# Altium PCB heatGun.PcbDoc
Units mm, origin at the board's own origin, x right, y up, seen from the top; angles counter-clockwise.
Board outline 152.4 x 101.6 mm, 2 copper layers (Top, Bottom); 58 components, 46 nets, 196 pads, 45 vias.
Unrouted connection lines stored in the file: 1.
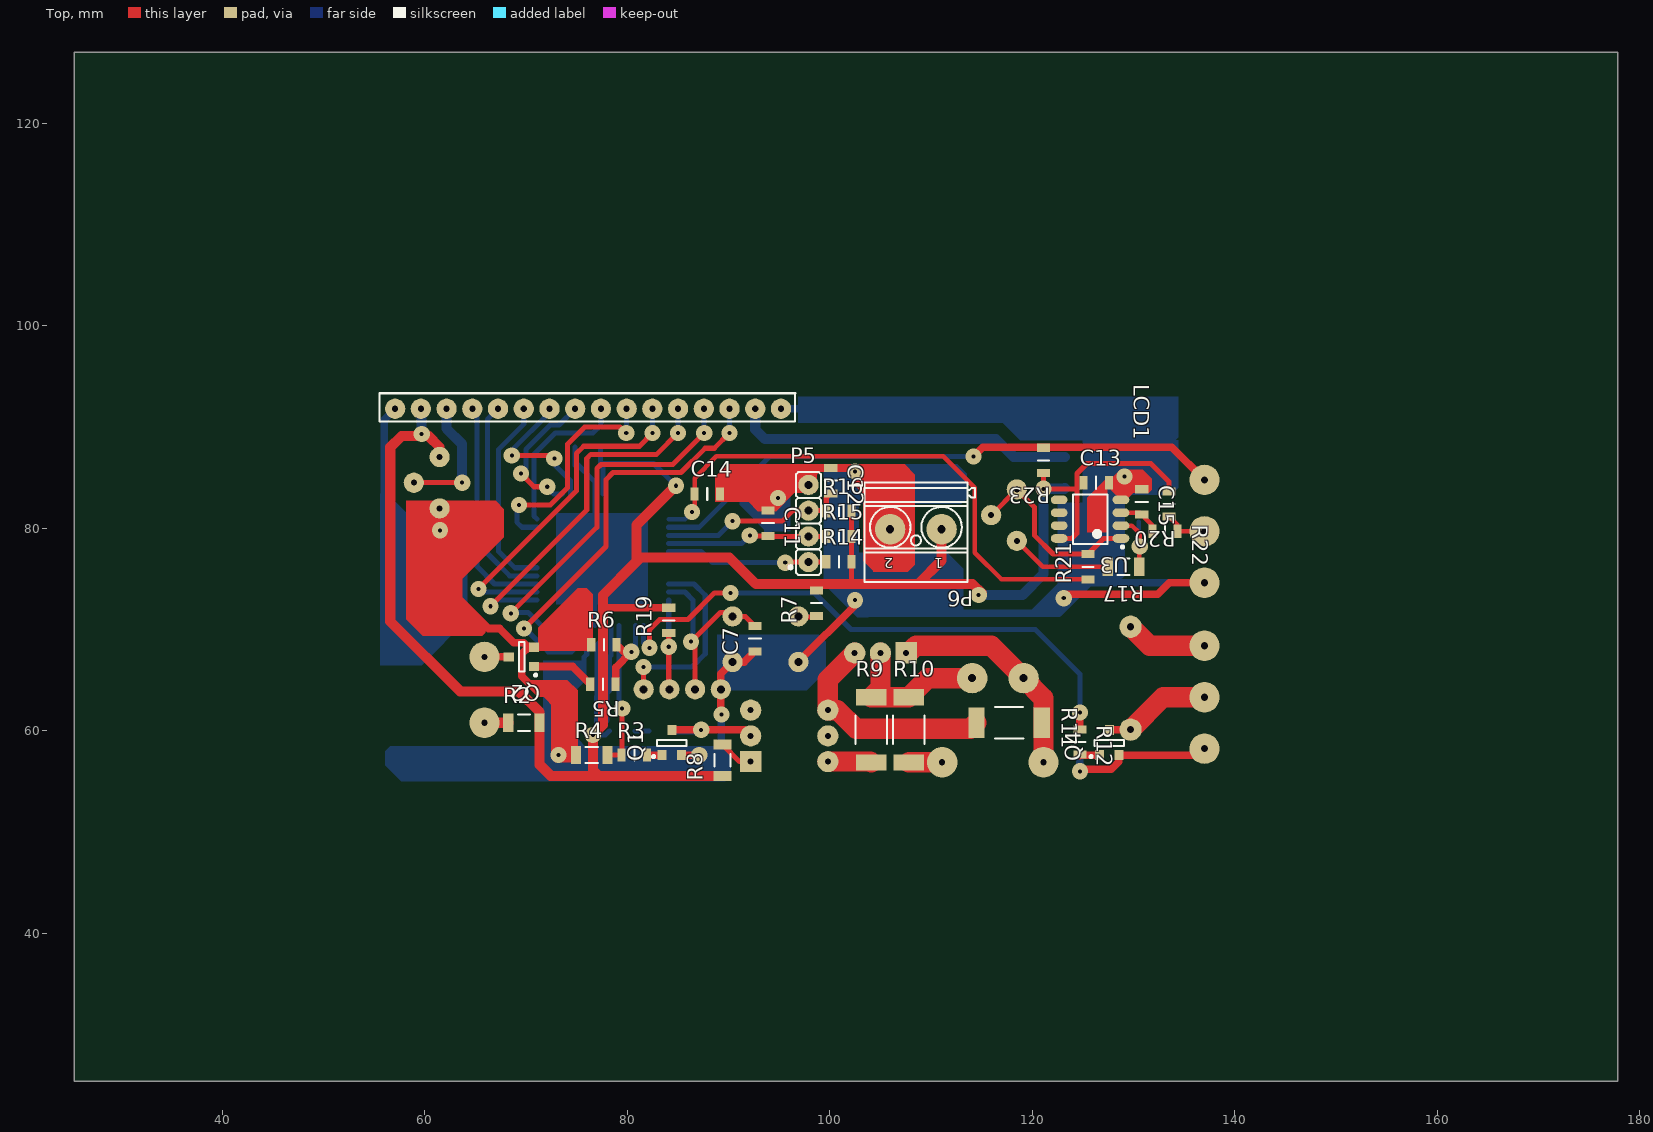
[diagram p0: Top view]
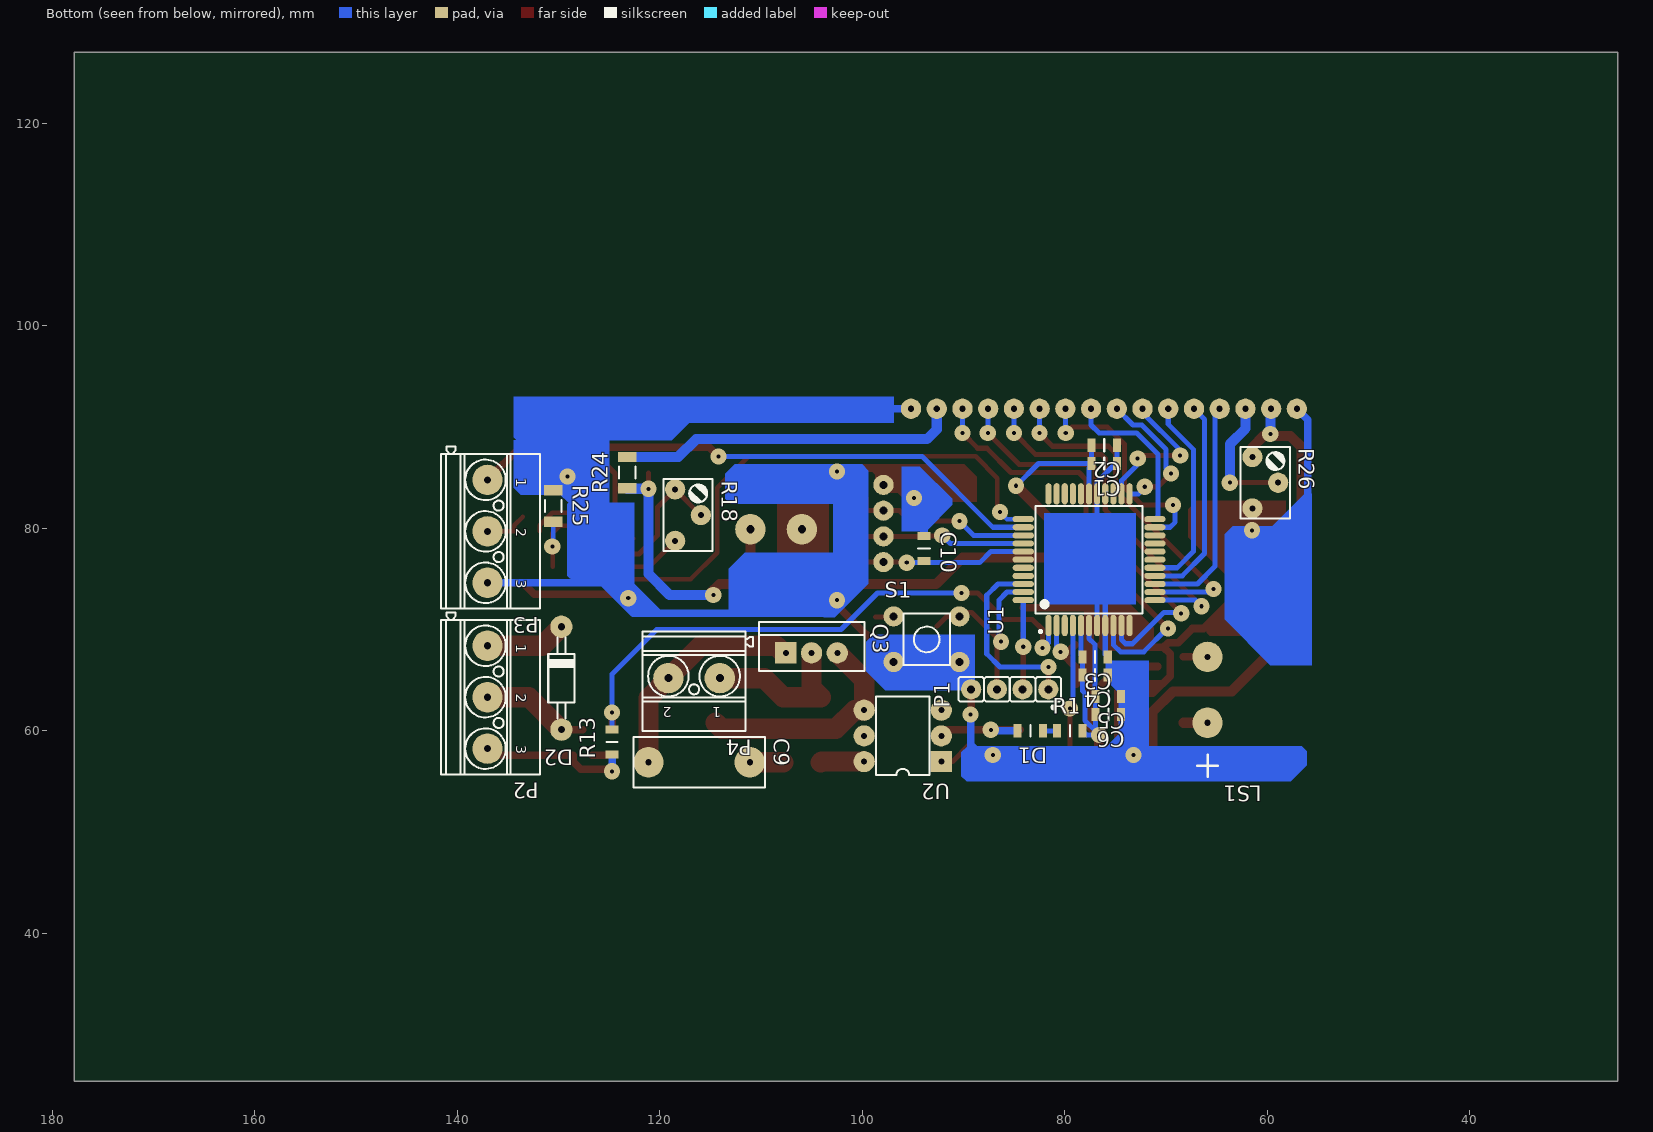
[diagram p1: Bottom view, seen from below]
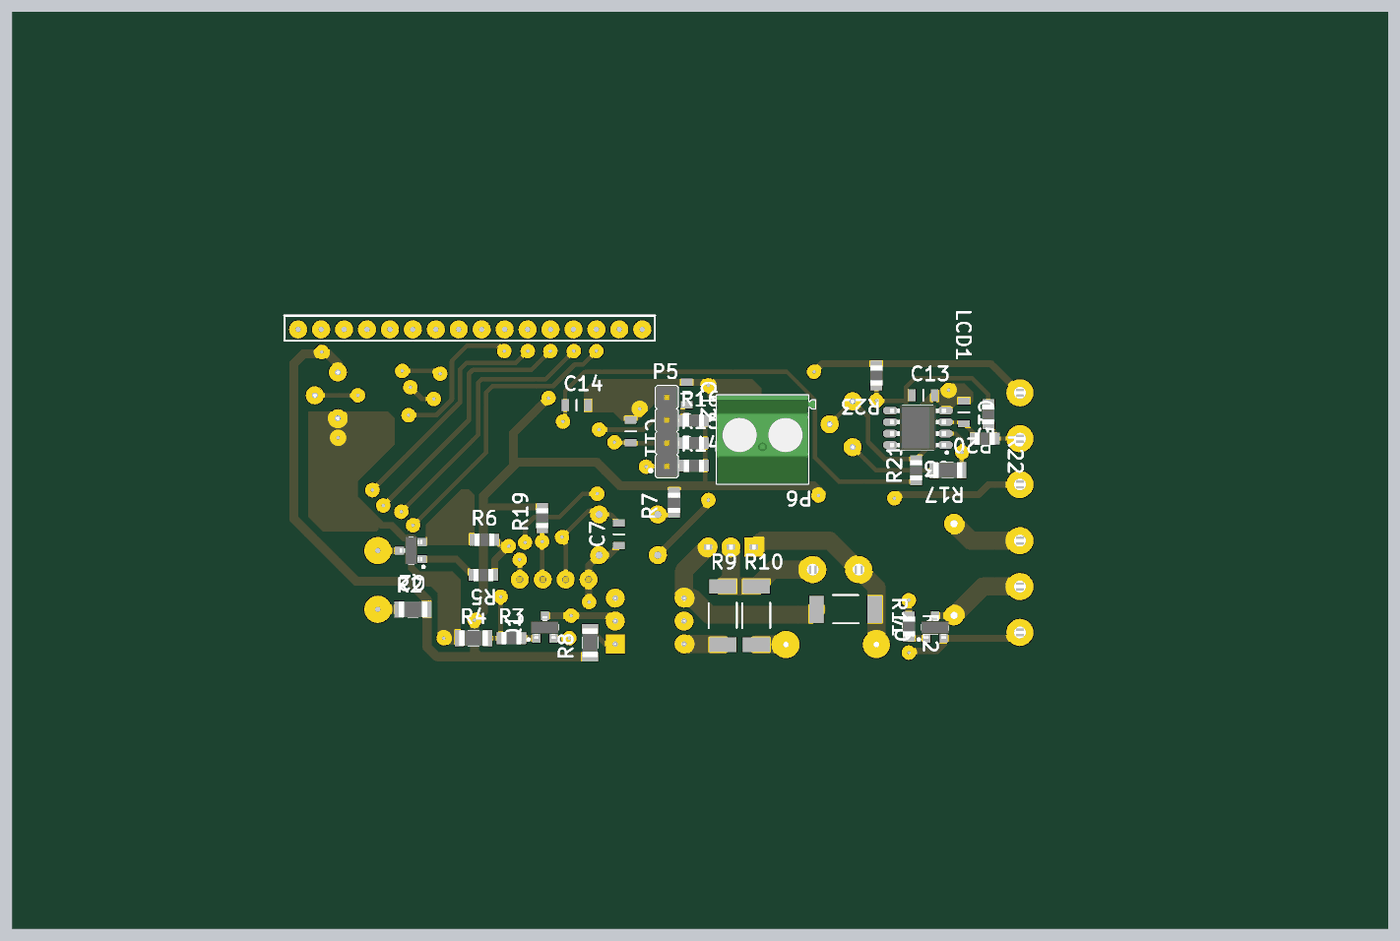
[diagram p2: 3D render of the assembled board from above, using the file's embedded part models]
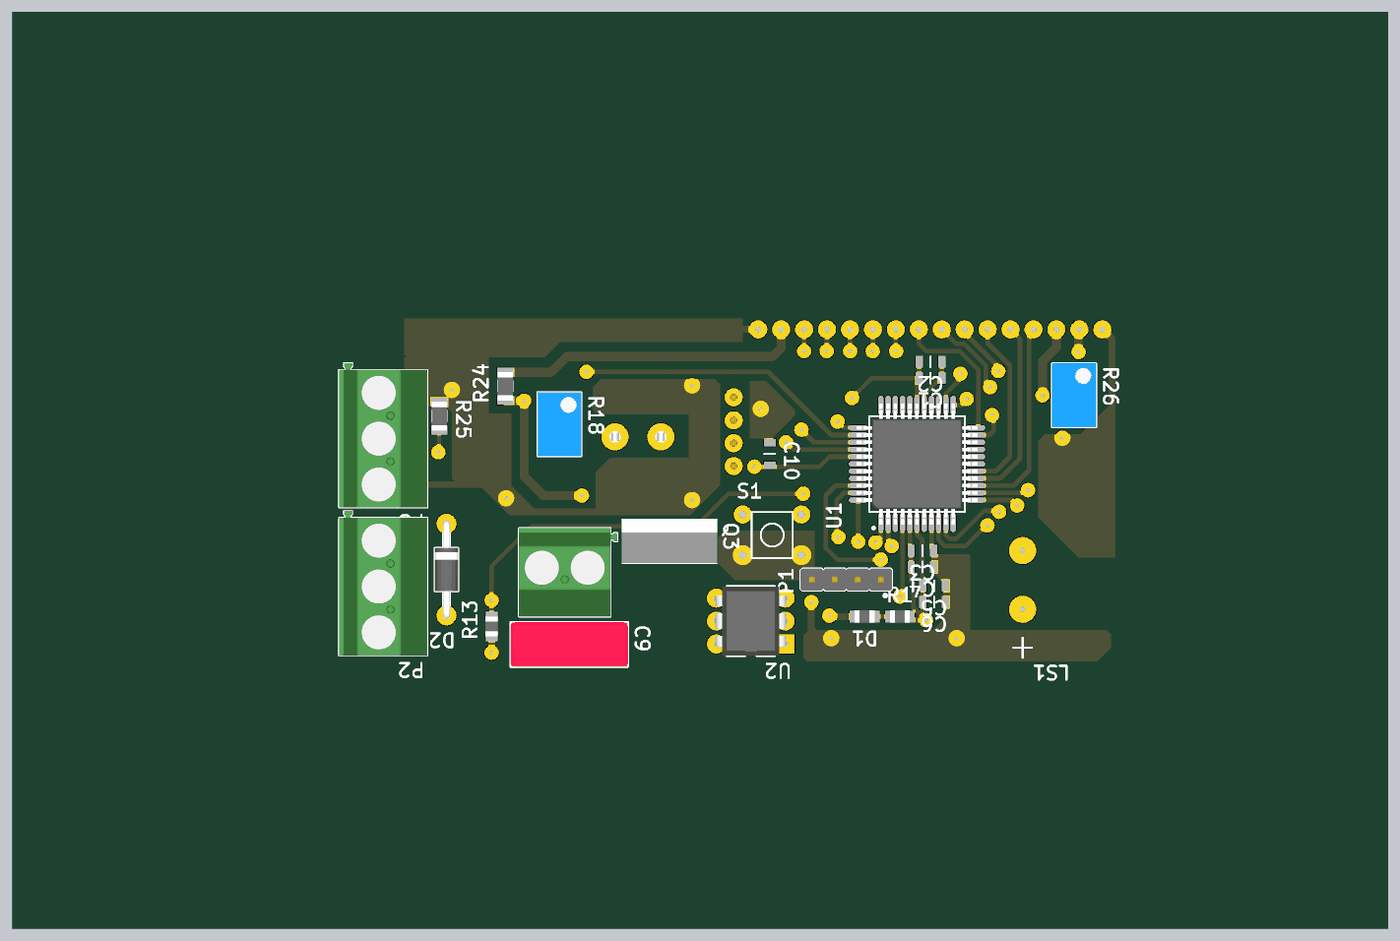
[diagram p3: 3D render of the assembled board from below, using the file's embedded part models]

## Layer stack, top to bottom
Top Solder: solder mask 0.0102, Solder Resist, Dk 3.5
Top: signal copper 0.0356
Dielectric 1: dielectric 0.32, FR-4, Dk 4.8
Bottom: signal copper 0.0356
Bottom Solder: solder mask 0.0102, Solder Resist, Dk 3.5

## Board outline
25.4,25.4 177.8,25.4 177.8,127 25.4,127

## Design rules (kind name [scope] priority, off if disabled: settings)
Clearance [All] p1: gap=0.1 except(0.2: Arc-Poly Track-Poly SMDPad-Poly THPad-Poly Via-Poly Fill-Poly Poly-Poly)
ComponentClearance ComponentClearance_1 [All] p1: gap=0.254 collisioncheckmode=3 verticalgap=0.254 showdistances=FALSE
ComponentClearance lcd [InComponent('LCD1')] p2: gap=0 collisioncheckmode=3 verticalgap=2540 showdistances=FALSE
PolygonConnect [All] p1: connectstyle=Relief reliefconductorwidth=0.4 reliefentries=4 polygonreliefangle="90 Angle" airgapwidth=0.3
RoutingVias [All] p1: holewidth=0.4 width=1.6 viastyle="Through Hole" minholewidth=0.4 minwidth=1.6 maxholewidth=0.4 maxwidth=1.6
SolderMaskExpansion [All] p1: expansion=0.102
Width [All] p1: maxlimit=10 minlimit=0.3 preferedwidth=0.5
29 further rules are at their usual default settings.

## Components (designator, comment, footprint, x,y, rotation, side; value= is the part's Value field where it differs from the comment)
C1 "Cap 0.1uf" 0805_C 76.1,86.4 r0 bottom
C2 "Cap 1uf" 0805_C 76.1,88.2 r0 bottom
C3 "Cap 0.1uf" 0805_C 77,67.3 r0 bottom
C4 "Cap 1uf" 0805_C 77,65.5 r0 bottom
C5 "Cap 0.1uf" 0805_C 75.7,63.4 r0 bottom
C6 "Cap 1uf" 0805_C 75.7,61.6 r0 bottom
C7 "Cap 0.1uf" 0805_C 92.6,69.1 r90 top
C9 "Cap 0.01uf 275VAC" CAPR1000-500X1300X1100 116.1,56.9 r180 bottom
C10 "Cap 0.01uf" 0805_C 93.9,78 r270 bottom
C11 "Cap 0.01uf" 0805_C 93.9,80.5 r270 top
C12 "Cap 0.1uf" 0805_C 100.1,84.7 r270 top
C13 "Cap 0.1uf" 0805_C 126.3,84.5 r0 top
C14 "Cap 0.1uf" 0805_C 87.9,83.4 r0 top
C15 "Cap 0.01uf" 0805_C 130.8,82.6 r270 top
D1 "LED1_smd" 0805_R 83.4,60 r0 bottom
D2 "fr107" DO-41 129.7,65.2 r270 bottom
LCD1 "LCD1602" "LCD1602 w/o body" 76.13,91.8 r0 top
LS1 "Beeper" Beeper 65.9,64.05 r270 bottom
P1 "Pin header 4" Pin_header_4P_2.54_M 81.62,64.1 r0 bottom
P2 "Pin header 3" PHOENIX_1715734 137,63.32 r270 bottom
P3 "Pin header 3" PHOENIX_1715734 137,79.7 r270 bottom
P4 "Pin header 2" PIN_HEADER_2_5.08 116.6,65.2 r0 bottom
P5 "Pin header 4" Pin_header_4P_2.54_M 97.9,76.66 r90 top
P6 "Pin header 2" PIN_HEADER_2_5.08 108.5,79.9 r180 top
Q1 "S9013" SOT23 84.4,58.8 r90 top
Q2 "S9013" SOT23 69.6,67.3 r180 top
Q3 "Triac" TO-220-v 105,67.7 r180 bottom
Q4 "BC817" SOT23 127.6,58.8 r90 top
R1 "Res 390" 0805_R 79.5,60 r180 bottom
R2 "Res 100" 1206_R 69.8,60.8 r0 top
R3 "Res 1K5" 0805_R 80.7,57.6 r0 top
R4 "Res 10K" 1206_R 76.5,57.6 r0 top
R5 "Res 1K5" 0805_R 77.6,64.6 r180 top
R6 "Res 10K" 0805_R 77.7,68.5 r0 top
R7 "Res 10K" 0805_R 98.7,72.6 r90 top
R8 "Res 39" 1206_R 89.4,57.1 r90 top
R9 "Res 360" 2512_S 104.1,60.1 r90 top
R10 "Res 39" 2512_S 107.8,60.1 r90 top
R11 "Res 330" 2512_S 117.7,60.8 r0 top
R12 "Res 1K5" 0805_R 124.7,58.9 r270 top
R13 "Res 10K" 0805_R 124.7,58.9 r90 bottom
R14 "Res 4K7" 0805_R 100.9,76.7 r0 top
R15 "Res 4K7" 0805_R 100.9,79.2 r0 top
R16 "Res 10K" 0805_R 100.9,81.7 r0 top
R17 "Res 56K" 1206_R 129,76.2 r180 top
R18 "RPot_100k" TRIM_BOURNS_3266W 117.2,81.3 r270 bottom
R19 "Res 10K" 0805_R 84.1,70.9 r90 top
R20 "Res 10K" 0805_R 133.5,82.4 r270 top
R21 "Res 10K" 0805_R 125.5,76.2 r90 top
R22 "Res 10K" 0805_R 133.1,79.7 r0 top
R23 "Res 10K" 0805_R 121.1,86.7 r270 top
R24 "Res 100" 1206_R 123.2,85.5 r90 bottom
R25 "Res 1K" 1206_R 130.5,82.2 r270 bottom
R26 "RPot_10k" TRIM_BOURNS_3266W 60.2,84.5 r270 bottom
S1 "SW_TAKT" TAKT-KEY 96.9,66.8 r180 bottom
U1 "MKE04Z128VLD4" QFP80P1390X1390X245-44N 77.6,76.9 r90 bottom
U2 "MOC3041" DIP6-300 96,59.5 r0 bottom
U3 "LM358ADR" SOIC127_8 125.7,80.9 r180 top

## Footprints (in the part's own frame and the unit in brackets; to place one, negate y for a bottom-side part, rotate by r counter-clockwise, add the part's x,y. Pads: shape width x height; smd on the part's side, far side on the other; paste and mask are expansions set on the pad)
0805_C [mm] "Chip Resistor, Body 2.0x1.2mm, IPC Medium Density"
  rect 0.8x1.3 smd: 1(-1.25,0) 2(1.25,0)
  silkscreen extent 0,-0.6 0,0.6, body extent -1.07,-0.7 1.07,0.7, height 0.7
0805_R [mm] "Chip Resistor, EIA 0805, Metric 2012, Body 2.0x1.25mm, IPC Medium Density"
  rect 0.8x1.3 smd: 1(-1.25,0) 2(1.25,0)
  silkscreen extent 0,-0.55 0,0.55, body extent -1.1,-0.67 1.1,0.68, height 0.5
1206_R [mm] "Chip Resistor, EIA 1206, Metric 3016, Body 3.05x1.55mm, IPC Medium Density"
  rect 1x1.8 smd: 1(-1.55,0) 2(1.55,0)
  silkscreen extent -0.6,-0.8 0.6,0.8, body extent -1.6,-0.85 1.6,0.85, height 0.65
2512_S [mm] "SMD"
  rect 1.6x3 smd: 1(-3.225,0) 2(3.225,0)
  silkscreen extent -1.4,-1.55 1.43,1.58, body extent -2.95,-1.58 2.95,1.58, height 1.4
Beeper [mm] "cell bat"
  round 3 hole 0.6: 1(3.25,0) 2(-3.25,0)
  silkscreen extent 6.4,-1 8.6,1
CAPR1000-500X1300X1100 [mm] "Capacitor Radial, Pin spacing 10mm - Body With 5mm X Body Length 13mm X Body Height 11mm"
  round 3 hole 0.6: 1(-5,0) 2(5,0)
  silkscreen extent -6.5,-2.5 6.5,2.5, body extent -6.5,-2.5 6.5,2.5, height 11
DIP6-300 [mm] "DIP 6 Leads, Row Spacing 7.62 mm; Pitch 2.54 mm"
  rect 2.1x2.1 hole 0.6: 1(-3.81,2.54)
  round 2.1 hole 0.6: 2(-3.81,0) 3(-3.81,-2.54) 4(3.81,-2.54) 5(3.81,0) 6(3.81,2.54)
  silkscreen extent -2.65,-3.88 2.65,3.88, body extent -3.93,-3.81 3.94,3.81, height 5.33
DO-41 [mm] "DO-41, Diode, Axial, Body 4.7 x 2.7 mm (LxDia. max), Pin spacing 10.16mm"
  round 2.2 hole 0.7: 1(-5.08,0) 2(5.08,0)
  silkscreen extent -4,-1.3 4,1.3, body extent -5.48,-1.3 5.48,1.3, height 2.6
"LCD1602 w/o body" [mm] "Thru-Hole; 3 Leads"
  round 2 hole 0.6: 1(-19.05,0) 2(-16.51,0) 3(-13.97,0) 4(-11.43,0) 5(-8.89,0) 6(-6.35,0) 7(-3.81,0) 8(-1.27,0) 9(1.27,0) 10(3.81,0) 11(6.35,0) 12(8.89,0) 13(11.43,0) 14(13.97,0) 15(16.51,0) 16(19.05,0)
  silkscreen extent -20.57,-1.27 20.45,1.52
PHOENIX_1715734 [mm] "Terminal Block, 17.5A 400V, Pitch 5.08mm, 3 Positions, Screw Connection"
  round 3 hole 0.7: 1(-5.08,0) 2(0,0) 3(5.08,0)
  silkscreen extent -8.36,-4.6 7.62,5.2, body extent -8.36,-4.6 7.62,5.2, height 14.19
PIN_HEADER_2_5.08 [mm] "Terminal Block, 17.5A 400V, Pitch 5.08mm, 2 Positions, Screw Connection"
  round 3 hole 0.8: 1(-2.54,0) 2(2.54,0)
  silkscreen extent -5.82,-4.6 5.08,5.2, body extent -5.82,-4.6 5.08,5.2, height 14.19
Pin_header_4P_2.54_M [mm] "4 Contacts Straight Strip Header Pitch 2.54mm L=6.3mm ''Mini-Wire-Wrap''"
  round 2 hole 0.8: 1(0,0) 2(2.54,0) 3(5.08,0) 4(7.62,0)
  silkscreen extent -1.27,-1.23 8.89,1.93, body extent -1.27,-1.22 8.89,1.23, height 8
QFP80P1390X1390X245-44N [mm] "QFP, 0.80mm Pitch, Square; 44 Pin, 10.00mm L X 10.00mm W X 2.45mm H body, IPC Medium Density"
  oval 2.1x0.6 smd: 1(-6.5,4) 2(-6.5,3.2) 3(-6.5,2.4) 4(-6.5,1.6) 5(-6.5,0.8) 6(-6.5,0) 7(-6.5,-0.8) 8(-6.5,-1.6) 9(-6.5,-2.4) 10(-6.5,-3.2) 11(-6.5,-4) 23(6.5,-4) 24(6.5,-3.2) 25(6.5,-2.4) 26(6.5,-1.6) 27(6.5,-0.8) 28(6.5,0) 29(6.5,0.8) 30(6.5,1.6) 31(6.5,2.4) 32(6.5,3.2) 33(6.5,4)
  oval 0.6x2.1 smd: 12(-4,-6.5) 13(-3.2,-6.5) 14(-2.4,-6.5) 15(-1.6,-6.5) 16(-0.8,-6.5) 17(0,-6.5) 18(0.8,-6.5) 19(1.6,-6.5) 20(2.4,-6.5) 21(3.2,-6.5) 22(4,-6.5) 34(4,6.5) 35(3.2,6.5) 36(2.4,6.5) 37(1.6,6.5) 38(0.8,6.5) 39(0,6.5) 40(-0.8,6.5) 41(-1.6,6.5) 42(-2.4,6.5) 43(-3.2,6.5) 44(-4,6.5)
  silkscreen extent -7.22,-5.3 5.3,5.3, body extent -6.7,-6.7 6.7,6.7, height 2.45
SOIC127_8 [mm] "SOIC, 1.27mm pitch; 8  pin, 3.91mm W X 4.88mm L, IPC Medium Density"
  oval 1.65x0.85 smd: 1(-3.05,1.905) 2(-3.05,0.635) 3(-3.05,-0.635) 4(-3.05,-1.905) 5(3.05,-1.905) 6(3.05,-0.635) 7(3.05,0.635) 8(3.05,1.905)
  silkscreen extent -3.33,-2.45 1.7,2.87, body extent -3.1,-2.5 3.1,2.5, height 3.63
SOT23 [mm] "SOT23 3-Leads, 0.95mm pitch; 3 pin, 1.296mm W X 2.858mm L X 1.194mm H body, IPC Medium Density"
  rect 1x0.9 smd: 1(-1.2,0.95) 2(-1.2,-0.95) 3(1.3,0)
  silkscreen extent -1.47,-1.45 0.28,1.92, body extent -1.25,-1.5 1.25,1.5, height 1.19
TAKT-KEY [mm]
  round 2 hole 0.8 unplated: 1(0,0) 1(6.5,0) 2(0,4.5) 2(6.5,4.5)
  silkscreen extent 0.98,-0.32 5.56,4.76
TO-220-v [mm] "TO-220 3-Terminal - Vertical Mount"
  rect 2.1x2.1 hole 0.6: 1(-2.54,0)
  round 2.1 hole 0.6: 2(0,0) 3(2.54,0)
  silkscreen extent -5.21,-1.78 5.21,3.05, body extent -5.27,-1.75 5.27,2.95, height 20.5
TRIM_BOURNS_3266W [mm] "Trimming Potentiometer BOURNS 3266W Series"
  round 2 hole 0.6: 1(-2.54,-1.27) 2(0,1.27) 3(2.54,-1.27)
  silkscreen extent -3.55,-2.44 3.55,2.44, body extent -3.54,-2.44 3.55,2.44, height 8.77

## Part data
C9: "Capacitor"
D1: "Typical RED GaAs LED"
D2: "1 Amp Impulse diode"
LCD1: "Display"
LS1: "Electrical Bell"
Q1 Q2: "NPN transistor"
Q3: "Silicon Bidirectional Triode Thyristor"
Q4: "NPN Bipolar Transistor"
R1 R2 R3 R4 R5 R6 R7 R8 R9 R10 R11 R12 R13 R14 R15 R16 R17 R19 R20 R21 R22 R23 R24 R25: "Resistor"
R18 R26: "Potentiometer"
U2: "MOC"
U3: "Dual Operational Amplifier"

## Via types
v1: diameter 1.6, hole 0.4, Top to Bottom, 45 vias

## Nets (pads, with @x,y where several pads share a name; then routed paths per layer and width w, separated by ;. In a path a pad name is that pad's centre, name@x,y a point inside that pad or via, vN(x,y) a via of type N, cw(c..) or ccw(c..) an arc to the next point about the centre after c; other vN are vias at no path point)
32V: D2.1 P2.1 | length 8.1
  Top w2: D2.1 131.58,68.4 P2.1
BEEP: LS1.2 Q2.3 | length 2.4
  Top w0.75: LS1.2 Q2.3
BEEPER: R5.1 R6.2 U1.2 | length 8.5
  Top w0.75: R5.1 78.85,66.25 v1(80.4,67.8) 79.65,67.8 R6.2
  Bottom w0.5: v1@80.3,67.7 v1(80.4,67.8) 80.8,68.2 U1.2
D0: LCD1.7 U1.24 | length 13.9
  Top w0.5: v1(68.6,87.2) 72.5,87.2 v1(72.8,86.9)
  Bottom w0.5: v1(68.6,87.2) 68.6,87.7 72.32,91.42 LCD1.7 ; v1@72.9,86.2 74.4,84.7 U1.24
D1: LCD1.8 U1.23 | length 14.2
  Top w0.5: v1(69.5,85.4) 70.8,84.1 v1(72.1,84.1)
  Bottom w0.5: v1(69.5,85.4) 70,85.9 70,87.8 72.4,90.2 73.26,90.2 LCD1.8 ; v1@72,84.1 72.7,83.4 U1.23
D2: LCD1.9 U1.22 | length 15.9
  Bottom w0.5: U1.22 70.8,81.2 70.8,87.3 72.9,89.4 76.6,89.4 77.4,90.2 LCD1.9
D3: LCD1.10 U1.21 | length 23.1
  Top w0.5: v1(69.3,82.3) 72.4,82.3 74.1,84 74.1,88.3 75.8,90 79.3,90 v1(79.9,89.4)
  Bottom w0.5: v1@69.1,82.5 69.1,80.6 69.6,80.1 U1.21 ; v1(79.9,89.4) 79.94,89.44 LCD1.10
D4: LCD1.11 U1.13 | length 34.1
  Top w0.5: v1(65.3,74) 75,83.7 75,87.4 75.7,88.1 81.2,88.1 v1(82.5,89.4)
  Bottom w0.5: v1(65.3,74) 65.6,73.7 U1.13 ; LCD1.11 82.48,89.42 v1(82.5,89.4)
D5: LCD1.12 U1.12 | length 35.8
  Top w0.5: v1(66.5,72.3) 76,81.8 76,86.9 76.4,87.3 82.9,87.3 v1(85,89.4)
  Bottom w0.5: v1(66.5,72.3) 67.1,72.9 U1.12 ; v1(85,89.4) 85.02,89.42 LCD1.12
D6: LCD1.13 U1.10 | length 40.9
  Top w0.5: v1(68.5,71.6) 77,80.1 77,85.9 77.4,86.3 84.5,86.3 v1(87.6,89.4)
  Bottom w0.5: v1@68.6,71.7 70.2,71.7 73.3,68.6 74,68.6 74.4,69 U1.10 ; LCD1.13 87.56,89.44 v1(87.6,89.4)
D7: LCD1.14 U1.9 | length 43
  Top w0.5: v1(69.8,70.1) 77.9,78.2 77.9,84.8 78.6,85.5 85.3,85.5 87.7,87.9 88.6,87.9 v1(90.1,89.4)
  Bottom w0.5: v1@69.9,70.1 72.2,67.8 74.5,67.8 75.2,68.5 U1.9 ; v1(90.1,89.4) LCD1.14
E: LCD1.6 U1.16 | length 19.6
  Bottom w0.5: LCD1.6 69.78,90.28 67.3,87.8 67.3,77.7 68.9,76.1 U1.16
ENC+: C10.2 P5.1 R14.1 U1.38 | length 16.2
  Top w0.5: v1@95.4,76.65 97.89,76.65 P5.1 99.61,76.66 R14.1
  Bottom w0.5: U1.38 87.3,77.7 88.4,76.6 v1(95.6,76.6)
ENC-: C11.2 P5.2 R15.1 U1.37 | length 16.3
  Top w0.5: v1@91.7,79.25 C11.2 93.95,79.2 P5.2 R15.1
  Bottom w0.5: U1.37 91.3,78.5 v1(92.1,79.3)
ENC_BUTTON: C12.2 P5.3 R16.1 U1.36 | length 18.5
  Top w0.5: v1(90.4,80.7) 95.3,80.7 96.34,81.74 P5.3 99.61,81.74 R16.1 99.65,83 C12.2
  Bottom w0.5: U1.36 89,79.3 v1(90.4,80.7)
FAN: R12.1 R13.2 U1.1 | length 58.8
  Top w0.5: v1(82.2,68.2) 82.2,70 83.2,71 86,71 88.6,73.6 v1(90.2,73.6)
  Top w0.75: R12.1 124.7,61.7 v1@124.8,61.8
  Bottom w0.5: U1.1 81.6,68.7 v1@82.2,68.1 ; v1(90.2,73.6) 98.5,73.6 102.1,70 120.3,70 124.7,65.6 v1(124.7,61.8) R13.2
FASE: P4.1 Q3.2 R9.2 R10.2 | length 15.5
  Top w2: Q3.2 105,64.225 R9.2 R10.2 109.675,65.2 P4.1
GND: C1.1 C2.1 C3.1 C4.1 C5.1 C6.1 C7.1 C10.1 C11.1 C12.1 C13.2 C14.2 C15.1 LCD1.1 LCD1.16 P1.4 P2.3 P3.3 P5.4 P6.2 Q1.2 Q2.2 Q4.2 R4.1 R6.1 R13.1 R25.1 R26.3 S1.1 U1.7 U1.8 U1.27 U3.4 | length 286.6
  Top w0.5: v1@73.2,58 v1(73.2,57.6) R4.1
  Top w0.75: R26.3 61.47,74.93 66.3,70.1 67.4,70.1 68.8,68.7 69.8,68.7 70.25,68.25 ; v1@73.2,58 73.2,62.4 71.9,63.7 71.3,63.7 69.6,65.4 69.6,67.6 70.25,68.25 ; R6.1 76.2,68.25 Q2.2 70.25,68.25 ; Q1.2 v1(87.1,57.6) ; C14.2 93.9,83.4 v1@94.6,82.7 ; v1(89.3,61.6) 89.24,61.66 P1.4 89.24,65.64 90.4,66.8 91.55,66.8 C7.1 ; C11.1 v1@94.725,82.575 ; v1@95.025,82.875 96.43,84.28 P5.4 97.9,85 98.85,85.95 C12.1 102.15,85.95 v1(102.5,85.6) ; S1.1@96.9,66.8 102.5,72.4 v1(102.5,72.9) ; v1@102.55,85.65 105.96,82.24 P6.2 ; v1(123.1,73.1) 123.5,73.5 132.4,73.5 133.52,74.62 P3.3 ; v1@124.7,56.2 127.8,56.2 128.55,56.95 Q4.2 136.36,57.6 P2.3 ; C13.2 128.75,83.3 ; v1(129.1,85.1) 128.75,84.75 128.75,83.3 ; C15.1 129.795,83.85 U3.4 128.75,83.3
  Bottom w0.5: v1(73.2,57.6) 74.45,58.85 74.45,59.55 ; C1.1@74.85,86.2 C1.1 C1.1@74.85,86.55 ; C2.1@74.85,88 C1.1@74.85,86.55 ; 76,73.2 U1.8 76,67.55 C3.1 75.75,65.15 74.45,63.85 C5.1 C6.1 74.45,59.55 ; U1.7 76.8,73.1 ; 76.8,79.8 U1.27 76.8,84.6 C1.1@74.85,86.55 ; v1(87.1,57.6) 76.4,57.6 74.45,59.55
  Bottom w0.75: LCD1.1 56,90.72 56,82.1 58.3,79.8 v1(61.5,79.8) ; v1(87.1,57.6) 88.3,57.6 89.3,58.6 v1(89.3,61.6) ; C10.1 93.9,82 v1(94.9,83) ; LCD1.16 124.7,91.8 129.1,87.4 v1(129.1,85.1) ; v1(102.5,85.6) v1(102.5,72.9) 103.8,71.6 122.6,71.6 125.62,74.62 126.7,74.62 ; v1@124.7,56.2 R13.1 ; R25.1 129.15,85.1 v1(129.1,85.1) ; P3.3 126.7,74.62 ; 126.7,74.62 126.6,74.72 126.6,82.6 v1(129.1,85.1)
  other v1: 124.7,56
HEATER: R3.1 R4.2 U1.4 | length 14.7
  Top w0.5: R4.2 79.35,57.6 79.5,57.75 v1(79.5,62.2)
  Bottom w0.5: U1.4 79.2,62.4 v1@79.75,61.85
LOAD: C9.1 P4.2 Q3.1 R11.2 | length 22.3
  Top w2: Q3.1 107.8,67.7 108.5,68.4 115.94,68.4 P4.2 121.1,63.24 C9.1
LOAD_FUN: D2.2 P2.2 Q4.3 | length 10.7
  Top w0.75: Q4.3 129.68,60.1 D2.2
  Top w2: D2.2 132.9,63.32 P2.2
NetC9_2: C9.2 R10.1 | length 3.3
  Top w2: R10.1 107.825,56.9 C9.2
NetC15_2: C15.2 R22.1 U3.3 | length 4.2
  Top w0.45: U3.3 130.615,81.535 C15.2 131.85,80.3 R22.1
NetD1_1: D1.1 R1.1 | length 1.4
  Bottom w0.5: R1.1 D1.1
NetLCD1_15: LCD1.15 R24.2 | length 33.7
  Bottom w1: LCD1.15 92.64,89.76 93.6,88.8 116.4,88.8 118.15,87.05 R24.2
NetLS1_1: LS1.1 R2.1 | length 2.4
  Top w1: LS1.1 R2.1
NetQ1_1: Q1.1 R3.2 | length 1.5
  Top w0.75: R3.2 Q1.1
NetQ2_1: Q2.1 R5.2 | length 6.3
  Top w0.75: Q2.1 74.6,66.35 R5.2
NetQ3_3: Q3.3 R11.1 U2.4 | length 22.4
  Top w2: Q3.3 99.81,65.05 U2.4 100.76,62.04 102.6,60.2 113.875,60.2 R11.1
NetQ4_1: Q4.1 R12.2 | length 2
  Top w0.75: R12.2@124.7,57.55 124.75,57.6 Q4.1
NetR8_2: R8.2 U2.1 | length 3.5
  Top w0.5: R8.2 91.09,56.96 U2.1
NetR9_1: R9.1 U2.6 | length 4.3
  Top w2: U2.6 104.015,56.96 R9.1
NetR17_1: R17.1 R25.2 U3.2 | length 7.6
  Top w0.45: U3.2 129.835,80.265 130.6,79.5 v1@130.6,78.6 ; R17.1 130.55,78.15 v1(130.6,78.2)
  Bottom w0.45: R25.2 130.5,78.3 v1(130.6,78.2)
NetR17_2: R17.2 R18.3 | length 10
  Top w0.45: R18.3 121.03,76.2 R17.2
NetR18_1: R18.1 R18.2 R21.2 U3.1 | length 18.8
  Top w0.5: R18.2 R18.1 120.2,82.11 120.2,79.3 122.05,77.45 R21.2 127.045,78.995 U3.1
RESET: C7.2 P1.3 R7.1 S1.2 U1.43 | length 21.5
  Top w0.5: P1.3 86.7,68.4 v1(86.3,68.8) 89.2,71.7 S1.2@90.4,71.7 ; S1.2@90.4,71.3 91.65,71.3 C7.2 ; S1.2@96.9,71.3 96.95,71.25 R7.1@98.7,71.25
  Bottom w0.5: U1.43 85.7,73.7 86.5,72.9 v1@86.5,68.7
RS: LCD1.4 U1.14 | length 22.1
  Bottom w0.5: LCD1.4@65.18,91.7 65.18,76.22 66.9,74.5 U1.14
RW: LCD1.5 U1.15 | length 20.5
  Bottom w0.5: LCD1.5 66.2,90.76 66.2,77.5 68.4,75.3 U1.15
SWDCLK: P1.1 U1.42 | length 19
  Top w0.5: v1(81.6,66.3) 81.6,66.34 v1@81.62,66.36 ; P1.1 v1@81.62,66.36 ; v1@81.62,66.36 81.8,66.54 81.62,66.72 v1@81.62,66.36
  Bottom w0.5: v1@82.3,66.3 86.4,66.3 87.7,67.6 87.7,73.4 86.6,74.5 U1.42
SWDIO: P1.2 R19.1 U1.44 | length 9.8
  Top w0.5: R19.1 v1(84.1,68.3) 84.1,64.16 P1.2
  Bottom w0.5: v1@84.1,68.7 U1.44
TC: C14.1 R21.1 U1.34 | length 54.7
  Top w0.45: v1@86.2,81.5 86.65,81.95 C14.1 86.65,84.95 88.8,87.1 111.2,87.1 114.3,84 114.3,77.6 116.95,74.95 R21.1
  Bottom w0.45: U1.34 85.7,80.9 v1(86.4,81.6)
TEMP: P3.2 R20.2 R22.2 | length 4.5
  Top w0.45: R20.2 134.35,80.3 R22.2 P3.2
TILT_SENSOR: P3.1 R23.1 U1.35 | length 57.5
  Top w0.75: v1(114.2,87.1) 115.1,88 133.78,88 P3.1
  Bottom w0.5: U1.35 87.1,80.1 94.1,87.1 v1(114.2,87.1)
TRIAC: D1.2 Q1.3 U2.2 | length 10.7
  Top w0.75: Q1.3 v1(87.3,60.1) 91.59,60.1 U2.2
  Bottom w0.75: D1.2 87.2,60 v1(87.3,60.1)
VDD: C1.2 C2.2 C3.2 C4.2 C5.2 C6.2 C13.1 LCD1.2 P6.1 R1.2 R2.2 R7.2 R8.1 R14.2 R15.2 R16.2 R19.2 R20.1 R23.2 R24.1 R26.1 U1.5 U1.6 U1.28 U3.8 | length 235.4
  Top w0.5: 102.15,74.5 R14.2 R16.2 ; R23.2 v1(121.1,83.9) 124.4,83.9 ; U3.8 123.895,78.995 124.4,79.5 124.4,83.9 ; R20.1 133.5,84.6 131.7,86.4 125.4,86.4 124.4,85.4 124.4,83.9
  Top w0.75: 77.6,72.15 R19.2
  Top w1: R26.1 61.47,88.03 60.4,89.1 57.7,89.1 56.6,88 56.6,70.8 63.5,63.9 69.3,63.9 71.35,61.85 R2.2 71.35,56.65 72.45,55.55 77.15,55.55 ; v1(84.8,84.2) 80.9,80.3 80.9,76.7 ; R8.1 77.15,55.55 ; P6.1 111.04,76.84 108.7,74.5 ; v1@115,73.6 114.1,74.5 108.7,74.5 ; 77.15,55.55 76.6,56.1 v1(76.6,59.6) 77.6,60.6 77.6,72.15 77.6,73.4 80.9,76.7 ; 80.9,76.7 81.3,77.1 90.1,77.1 92.7,74.5 102.15,74.5 108.7,74.5
  Bottom w0.5: C1.2@77.35,86.2 77.6,85.95 U1.28 ; C2.2@77.35,88 C1.2 82.6,86.4 v1(84.8,84.2) ; U1.6 77.6,69.1 77,68.5 77,63.45 C5.2 C6.2 v1@76.95,59.95 ; R1.2 77.85,59.6 v1(76.6,59.6) v1@76.95,59.95 ; U1.5 78.4,67.45 C3.2 C4.2 78.25,63.95 78,63.7 78,61 v1@76.95,59.95
  Bottom w1: LCD1.2 59.7,91.72 v1(59.7,89.3) ; v1(114.7,73.4) 119,73.4 121.1,75.5 v1(121.1,83.9) 123.15,83.9 R24.1
VO: LCD1.3 R26.2 | length 12.8
  Top w0.5: R26.2 v1(63.7,84.5) v1@63.8,84.5
  Bottom w1: LCD1.3 62.16,89.84 63.7,88.3 v1(63.7,84.5)
pads on no net: U1.3 U1.11 U1.17 U1.18 U1.19 U1.20 U1.25 U1.26 U1.29 U1.30 U1.31 U1.32 U1.33 U1.39 U1.40 U1.41 U2.3 U2.5 U3.5 U3.6 U3.7

## Other copper
Top:
  region net GND: 128,85.1 128.7,85.8 130.9,85.8 131.8,84.9 131.8,83.8 131.5,83.5 129.8,83.5 129.3,83 127.6,84.7
  region net GND: 127.4,83.9 127.4,79.6 125.4,79.6 125.4,83 127.3,84.9 127.7,84.9
  region net GND: 102.4,86.3 107.4,86.3 108.4,85.3 108.4,76.4 107.7,75.7 104.3,75.7 104.3,75.8 103.3,76.8 103.3,83.4 102.4,84.3
  region net GND: 98.7,86.3 89.9,86.3 88.7,85.1 88.7,82.6 92,82.6 92.9,81.7 94.7,81.7 96.5,83.5 98.5,83.5 98.7,83.7
  region net GND: 58.2,82.7 67,82.7 67.8,81.9 67.8,79.1 63.7,75 63.7,73 66,70.7 66,69.7 65.7,69.4 59.8,69.4 58.2,71
  region net GND: 76.6,68.7 76.6,73.5 76,74.1 75.1,74.1 71.2,70.2 71.2,68.2 76.4,68.2
  region net GND: 70.5,65 74.1,65 75.1,64 75.1,57.3 74.7,56.9 72.9,56.9 72.5,57.3 72.5,63
Bottom:
  region net GND: 125,88.7 125,82 128.2,82 128.7,82.5 129,82.5 129.8,83.3 133.7,83.3 134.4,84 134.4,88.7
  region net GND: 96.9,93 96.9,90.4 117.1,90.4 118.8,88.7 134.1,88.7 134.4,89 134.4,93
  region net GND: 122.5,82.5 122.5,74.5 119.7,71.7 119.7,71.6 122.7,71.6 125.8,74.7 128.5,74.7 129.1,75.3 129.1,82.4 129,82.5
  region net GND: 102.8,86.3 100,86.3 99.4,85.7 99.4,74.5 102.7,71.2 103.8,71.2 103.8,72.9 102.7,74
  region net GND: 102.4,86.3 112.6,86.3 113.5,85.4 113.5,82.9 113,82.4 102.4,82.4
  region net GND: 102.7,77.6 111.6,77.6 113.2,76 113.2,71.7 113,71.5 112.9,71.6 103.6,71.6 103.6,71.9 102.7,72.8
  region net GND: 96.1,86.1 94.3,86.1 91.1,82.9 91.1,82.3 93.7,79.7 96.1,79.7
  region net GND: 56.3,83.4 59.5,80.2 63.4,80.2 64.2,79.4 64.2,71 59.7,66.5 55.6,66.5 55.6,83.4
  region net GND: 74.4,66.9 75.7,66.9 75.7,65.3 74.3,63.9
  region net GND: 71.7,66.9 71.7,58.2 75.8,58.2 75.9,58.3 74.5,59.7 74.5,66.9
  region net GND: 74.7,59.2 75.6,58.3 74.4,58.3 74.3,58.2
  region net GND: 89.6,58.5 90.2,57.9 90.2,55.5 89.7,55 57.7,55 56.1,56.6 56.1,58 56.6,58.5
  region net GND: 88.9,69.5 98.9,69.5 99.6,68.8 99.6,65.9 97.7,64 88.9,64
  region net GND: 73,81.5 82,81.5 82,72.5 73,72.5

## Text inside footprints (layer, text, board x,y; h text height)
P2: Mechanical 14 "3" at 134.142,58.558 h1 r90; Mechanical 14 "2" at 134.143,63.638 h1 r90; Mechanical 14 "1" at 134.142,68.559 h1 r90; Bottom Overlay "3" at 134.142,58.558 h1 r90; Bottom Overlay "2" at 134.143,63.638 h1 r90; Bottom Overlay "1" at 134.142,68.559 h1 r90
P3: Mechanical 14 "3" at 134.143,74.938 h1 r90; Mechanical 14 "2" at 134.143,80.018 h1 r90; Mechanical 14 "1" at 134.143,84.939 h1 r90; Bottom Overlay "3" at 134.143,74.938 h1 r90; Bottom Overlay "2" at 134.143,80.018 h1 r90; Bottom Overlay "1" at 134.143,84.939 h1 r90
P4: Mechanical 14 "2" at 118.823,62.342 h1 r180; Mechanical 14 "1" at 113.901,62.342 h1 r180; Bottom Overlay "2" at 118.823,62.342 h1 r180; Bottom Overlay "1" at 113.901,62.342 h1 r180
P6: Top Overlay "2" at 106.277,77.042 h1 r180; Top Overlay "1" at 111.199,77.043 h1 r180; Mechanical 14 "2" at 106.277,77.042 h1 r180; Mechanical 14 "1" at 111.199,77.043 h1 r180